# EAGLE board batterie (EAGLE 9.6.2)
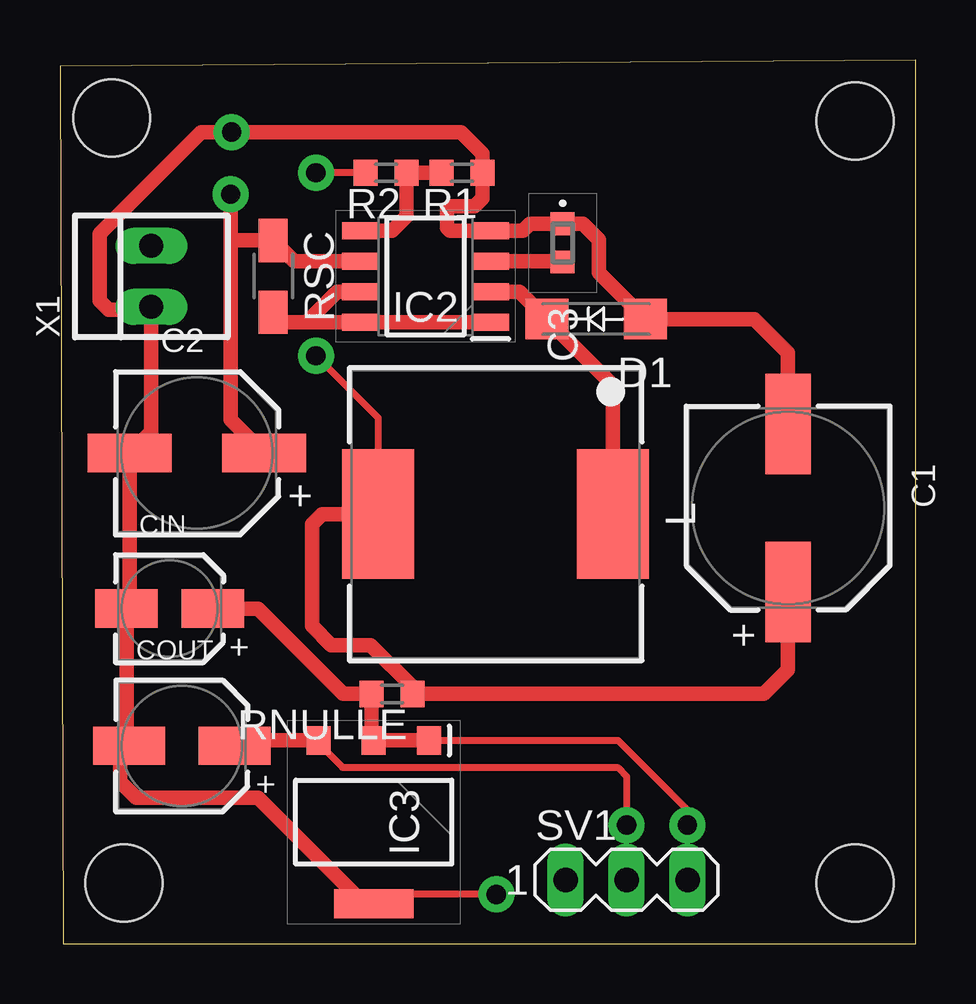
[diagram p0: board, top side]
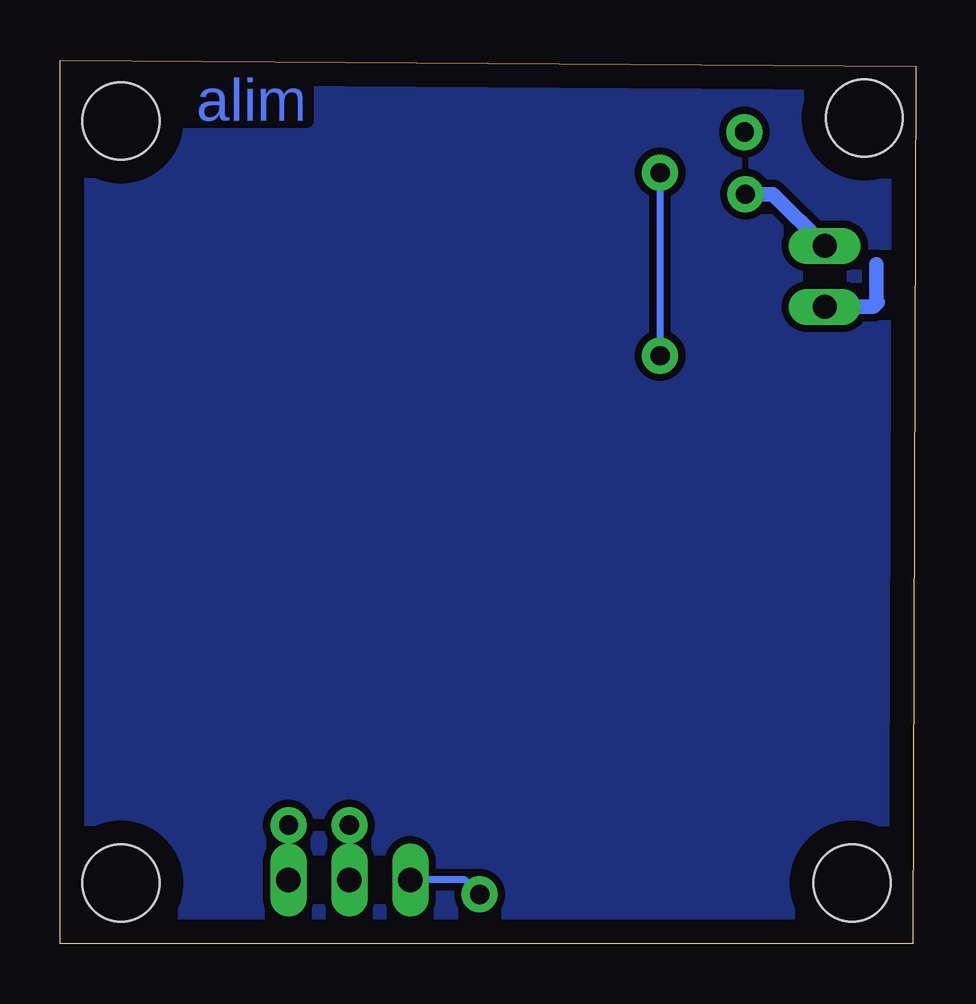
[diagram p1: board, bottom side, seen from below]

Size 35.69 x 36.83 mm. Coordinates in mm from the lower left corner, seen from the top.
Outline: 0.13,0 35.69,0 35.69,36.83 0,36.58 0.13,0
Copper layers (1*16): Top 0.035mm / dielectric 1.5mm / Bottom 0.035mm
Design rules "ENSEA_2022_04_08 *": minimum track width 0.2mm, minimum drill 0.6mm, track to track 0.3mm, track to pad 0.3mm, pad to pad 0.3mm, via to via 0.3mm, smd to smd 0.3mm, copper to edge 1mm, drill to drill 0.4mm, minimum pad ring 0.2mm, minimum via ring 0.2mm, stop-mask expansion 4mil, vias tented up to drill 0mil, thermal gap 0.4mm
Holes 3.2 mm at 2.67,2.54 2.16,34.42 33.15,2.54 33.15,34.29

## Footprints (pad centres in the part's own frame; a part is rotated, then mirrored left to right if it is on the bottom)
WCAP-ASLL_8X10.5(DXL) = smd 4.2 x 1.9: 1 3.5,0; 2 -3.5,0
WCAP-ASLL_6.3X7.7(DXL) = smd 3.5 x 1.6: 1 2.8,0; 2 -2.8,0
C0603 = smd 0.95 x 1: 1 -0.8,0; 2 0.8,0
WCAP-ASLL_4X5.5(DXL) = smd 2.6 x 1.6: 1 1.8,0; 2 -1.8,0
WCAP-ASLL_5X5.5(DXL) = smd 3 x 1.6: 1 2.2,0; 2 -2.2,0
SMA-DO214AC = smd 1.8 x 1.7: A -2.05,0; K 2.05,0
SOIC127P600X175-8N = smd 1.525 x 0.7: 1 -2.712,1.905; 2 -2.712,0.635; 3 -2.712,-0.635; 4 -2.712,-1.905; 5 2.712,-1.905; 6 2.712,-0.635; 7 2.712,0.635; 8 2.712,1.905
SOT230P700X175-4N = smd 1.2 x 1: 1 -3.4,2.3; 2 -3.4,0; 3 -3.4,-2.3 | smd 1.2 x 3.3: 4 3.4,0
WE-PDA_1260 = smd 5.4 x 3: 1 0,4.9; 2 0,-4.9
R0603 = smd 1 x 1.1: 1 -0.85,0; 2 0.85,0
R1206W = smd 1.8 x 1.2: 1 -1.499,0; 2 1.499,0
MA03-1 = drill 1.016 long: 1 -2.54,0; 2 0,0; 3 2.54,0
22-23-2021 = drill 1 long: 1 -1.27,0; 2 1.27,0

## Placement (x,y rotation side)
C1  470 µF  [WCAP-ASLL_8X10.5(DXL)]  30.35,18.16 270 top
C2  100 µF  [WCAP-ASLL_6.3X7.7(DXL)]  5.71,20.45 0 top
C3  C0603C471J5GACTU  [C0603]  20.95,29.21 270 top
CIN  10 µF  [WCAP-ASLL_4X5.5(DXL)]  4.57,13.97 0 top
COUT  22 µF  [WCAP-ASLL_5X5.5(DXL)]  5.08,8.26 0 top
D1  GF1  [SMA-DO214AC]  22.35,26.04 180 top
IC2  MC34063ACD-TR  [SOIC127P600X175-8N]  15.24,27.81 180 top
IC3  NCV33375ST3.3T3G  [SOT230P700X175-4N]  13.08,5.08 270 top
L  220uH  [WE-PDA_1260]  18.16,17.91 270 top
R1  [R0603]  16.76,32.13 180 top
R2  [R0603]  13.59,32.13 180 top
RNULLE  0  [R0603]  13.84,10.41 180 top
RSC  [R1206W]  8.89,27.81 270 top
SV1  [MA03-1]  23.62,2.67 0 top
X1  22-23-2021  [22-23-2021]  3.81,27.81 90 top

## Library data of the parts
C1 = C1; DATASHEET-URL: https://www.we-online.com/catalog/datasheet/865060353009.pdf; DF: 16%; DIAMETER: 8mm; I-LEAK: 75.2uA; I-RIPPLE: 600mA; L: 10.5mm; OPERATING-TEMPERATURE: -55 °C up to +105 °C; PART-NUMBER: 865060353009; TECHNICAL-REFERENCE: ASEE105471M016DVCTEE000; VR: 16V(DC); Z: 0.17Ohm
C2 = C2; DATASHEET-URL: https://www.we-online.com/catalog/datasheet/865060445005.pdf; DF: 14%; DIAMETER: 6.3mm; I-LEAK: 25uA; I-RIPPLE: 300mA; L: 7.7mm; OPERATING-TEMPERATURE: -55 °C up to +105 °C; PART-NUMBER: 865060445005; TECHNICAL-REFERENCE: ASED077101M025DVCTCB000; VR: 25V(DC); Z: 0.36Ohm
C3 = C0603C471J5GACTU; ARROW_PART_NUMBER: C0603C471J5GACTU; ARROW_PRICE-STOCK: https://www.arrow.com/en/products/c0603c471j5gactu/kemet-corporation?region=nac; DESCRIPTION: SMD Comm C0G, Ceramic, 470 pF, 5%, 50 VDC, 125 VDC, 125?C, -55?C, C0G, SMD, MLCC, Ultra-Stable, Low Loss, Class I, 0.1 % , 100 GOhms, 3.7 mg, 0603, 1.6mm, 0.8mm, 0.8mm, 0.7mm, 0.35mm, 4000, 78 Weeks, 120; HEIGHT: 0.87mm; MANUFACTURER_NAME: KEMET; MANUFACTURER_PART_NUMBER: C0603C471J5GACTU; MOUSER_PART_NUMBER: 80-C0603C471J5G; MOUSER_PRICE-STOCK: https://www.mouser.co.uk/ProductDetail/KEMET/C0603C471J5GACTU?qs=6Zy9Yzz7FWCvDjERNKhvPg%3D%3D
CIN = Cin; DATASHEET-URL: https://www.we-online.com/catalog/datasheet/865060440001.pdf; DF: 14%; DIAMETER: 4mm; I-LEAK: 3uA; I-RIPPLE: 90mA; L: 5.5mm; OPERATING-TEMPERATURE: -55 °C up to +105 °C; PART-NUMBER: 865060440001; TECHNICAL-REFERENCE: ASEB055100M025DVCTAB000; VR: 25V(DC); Z: 1.35Ohm
COUT = Cout; DATASHEET-URL: https://www.we-online.com/catalog/datasheet/865060442002.pdf; DF: 14%; DIAMETER: 5mm; I-LEAK: 5.5uA; I-RIPPLE: 150mA; L: 5.5mm; OPERATING-TEMPERATURE: -55 °C up to +105 °C; PART-NUMBER: 865060442002; TECHNICAL-REFERENCE: ASEC055220M025DVCTBB000; VR: 25V(DC); Z: 0.8Ohm
D1 = diode
IC2 = SamacSys_Parts; DESCRIPTION: MC34063ACD-TR, DC-DC Controller, 40 V, 8-Pin, SOIC; HEIGHT: 1.75mm; MANUFACTURER_NAME: STMicroelectronics; MANUFACTURER_PART_NUMBER: MC34063ACD-TR; MOUSER_PART_NUMBER: 511-MC34063ACD-TR; MOUSER_PRICE-STOCK: https://www.mouser.co.uk/ProductDetail/STMicroelectronics/MC34063ACD-TR?qs=zDcCjb1ShEnlEhOFqqejBw%3D%3D
IC3 = SamacSys_Parts; DESCRIPTION: ON SEMICONDUCTOR - NCV33375ST3.3T3G - Fixed LDO Voltage Regulator, 4.3V to 13V, 260mV Dropout, 3.3Vout, 300mAout, SOT-223-4; HEIGHT: 1.75mm; MANUFACTURER_NAME: onsemi; MANUFACTURER_PART_NUMBER: NCV33375ST3.3T3G; MOUSER_PART_NUMBER: 863-NCV33375ST3.3T3G; MOUSER_PRICE-STOCK: https://www.mouser.co.uk/ProductDetail/ON-Semiconductor/NCV33375ST33T3G?qs=Pqj8oIac8rWOl%252BM3OwXrOg%3D%3D
L = L; DATASHEET-URL: https://www.we-online.com/catalog/datasheet/784771221.pdf; FRES: 3.9MHz; IR: 0.99A; ISAT: 1.1A; MOUNT: SMT; PART-NUMBER: 784771221; RDC-MAX: 348mOhm; RDC-TYP: 290mOhm
R1 R2 RNULLE RSC = rcl; SPICEPREFIX: R
SV1 = con-lstb; OC_FARNELL: unknown; OC_NEWARK: unknown
X1 = con-molex; MF: MOLEX; MPN: 22-23-2021; OC_FARNELL: 1462926; OC_NEWARK: 25C3832

## Nets
GND: C1.2 C2.2 C3.1 CIN.2 COUT.2 D1.A IC2.4 IC3.4 R1.1 SV1.1 X1.1
N$1: C1.1 L.2 R2.2 RNULLE.1
N$2: IC2.1 IC2.7 IC2.8 RSC.2
N$3: IC2.5 R1.2 R2.1
N$6: D1.K IC2.2 L.1
N$7: C3.2 IC2.3
VCC_3.3V: COUT.1 IC3.3 SV1.2
VCC_5V: CIN.1 IC3.1 IC3.2 RNULLE.2 SV1.3
VCC_PILES: C2.1 IC2.6 RSC.1 X1.2

## Tracks (layer width: path | path; a pad name or v marks a point on that pad's centre or on a via)
GND  (via drill 0.8 pad 1.5)
  Top 0.3: 3.68,26.42 X1.1 | v18.19,2.06 13.46,2.06 IC3.4
  Top 0.6: X1.1 3.81,21.34 C2.2 2.92,14.11 CIN.2 2.77,8.36 COUT.2 2.52,8.62 2.52,6.75 3.17,6.1 8.26,6.1 12.67,1.68 IC3.4 | C1.2 30.35,24.64 28.96,26.04 D1.A 22.48,27.96 22.48,29.34 21.81,30.01 C3.1 19.6,30.01 19.3,29.72 IC2.4 16.26,29.72 16.13,29.84 16.13,30.61 16.26,30.73 17.27,30.73 17.61,31.08 R1.1 17.61,32.93 16.72,33.83 v7.16,33.83 5.89,33.83 1.65,29.59 1.65,26.8 2.03,26.42 3.68,26.42
  Bottom 0.3: v18.19,2.06 18.8,2.67 SV1.1
  Bottom 0.6: 1.65,28.32 1.65,26.67 | 1.65,26.67 1.59,26.73 | 1.65,26.67 1.78,26.54 X1.1
N$1  (via drill 0.8 pad 1.5)
  Top 0.3: R2.2 v10.67,32.13 | v10.67,24.51 13.26,21.92 L.2
  Top 0.6: L.2 10.92,17.91 10.5,17.49 10.5,13.25 11.3,12.45 12.95,12.45 14.69,10.71 RNULLE.1 29.34,10.41 30.35,11.43 C1.1
  Bottom 0.3: v10.67,32.13 v10.67,24.51
N$2
  Top 0.6: 10.29,25.91 IC2.8 IC2.1 | 10.29,25.91 9.3,25.91 RSC.2 | IC2.7 11.56,27.18 10.29,25.91
N$3
  Top 0.6: IC2.5 13.84,29.72 14.44,30.31 R2.1 R1.2
N$4
  pour Bottom: 0.13,0.25 35.31,0.25 35.31,36.58 0.13,36.58
N$6
  Top 0.6: IC2.2 19.16,27.18 D1.K 23.06,23.28 L.1
N$7
  Top 0.6: IC2.3 20.92,28.45 C3.2
VCC_3.3V  (via drill 0.8 pad 1.5)
  Top 0.3: IC3.3 10.78,8.35 11.78,7.35 23.25,7.35 23.62,6.99 v23.62,4.95
  Top 0.6: COUT.1 7.5,8.48 IC3.3
  Bottom 0.3: v23.62,4.95 SV1.2
VCC_5V  (via drill 0.8 pad 1.5)
  Top 0.3: IC3.1 23.27,8.48 26.16,5.59 v26.16,4.95
  Top 0.6: CIN.1 8.26,13.97 11.81,10.41 RNULLE.2 12.99,8.57 IC3.2 IC3.1
  Bottom 0.3: v26.16,4.95 SV1.3
VCC_PILES  (via drill 0.8 pad 1.5)
  Top 0.6: 7.11,29.31 RSC.1 9.75,28.45 IC2.6 | C2.1 7.11,21.85 7.11,29.31 | v7.11,31.24 7.11,29.31
  Bottom 0.6: X1.2 5.97,31.24 v7.11,31.24

## Text on the board
Bottom: alim